# Altium PCB clip_adapter_2.54mm.PcbDoc
Units mm, origin at the board's own origin, x right, y up, seen from the top; angles counter-clockwise.
Board outline 16 x 16 mm, 2 copper layers (Top Layer, Bottom Layer), stack 1.573 mm thick; 2 components, 0 nets, 14 pads, 0 vias.
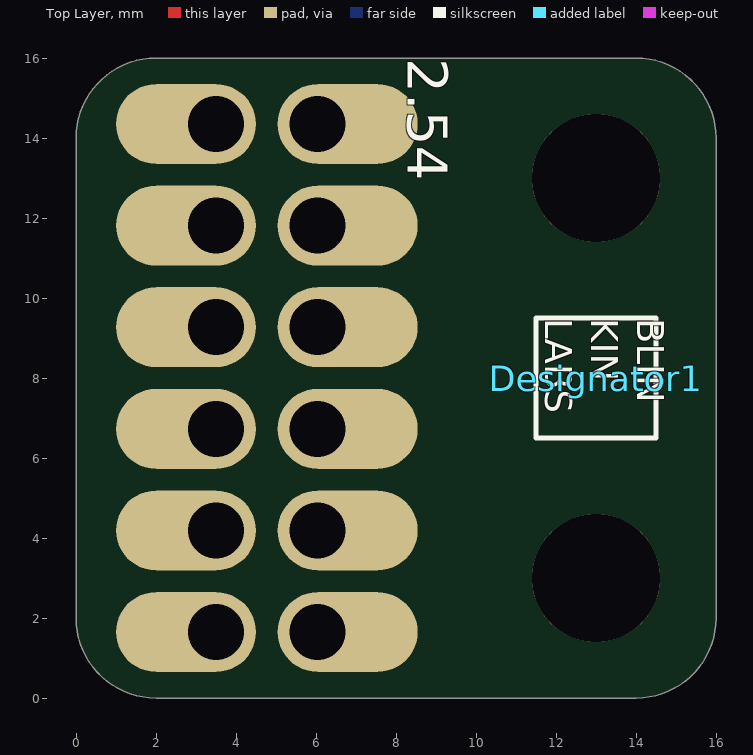
[diagram p0: Top Layer view]
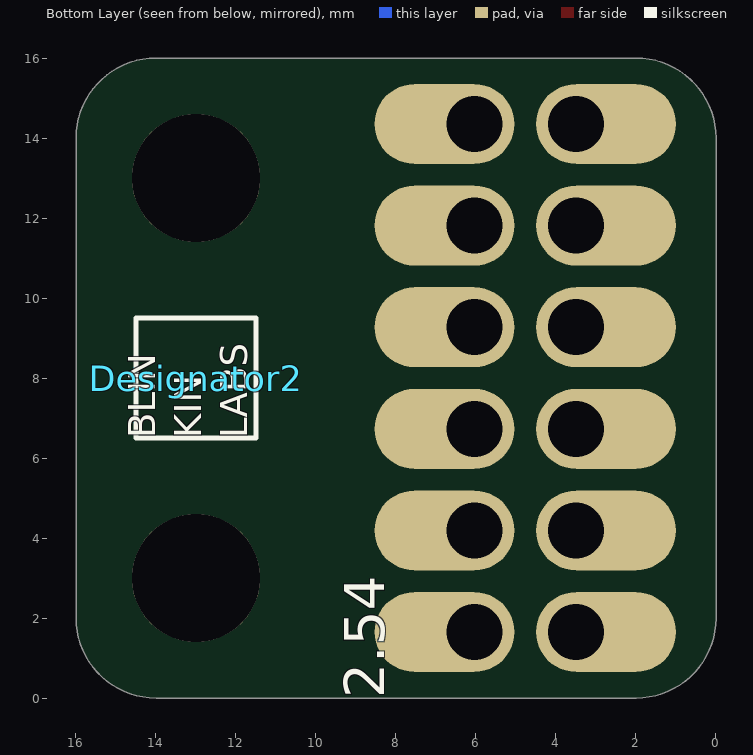
[diagram p1: Bottom Layer view, seen from below]

## Layer stack, top to bottom
Top Solder: solder mask 0.0127, Solder Resist, Dk 3.8
Top Layer: signal copper 0.0356
Dielectric 1: dielectric 1.502, FR-4, Dk 4.8
Bottom Layer: signal copper 0.0356
Bottom Solder: solder mask 0.0127, Solder Resist, Dk 3.8

## Board outline
-0.004,2 -0.004,14 cw(c1.996,14) 1.996,16 13.996,16 cw(c13.996,14) 15.996,14 15.996,2 cw(c13.996,2) 13.996,0 1.996,0 cw(c1.996,2)

## Design rules (kind name [scope] priority, off if disabled: settings)
Clearance [All] p1: gap=0.254 ignorepadtopadclearanceinfootprint=FALSE except(0: Arc-Hole Track-Hole SMDPad-Hole THPad-Hole Via-Hole Fill-Hole Poly-Hole Region-Hole Text-Hole)
PolygonConnect [All] p1: connectstyle=Relief reliefconductorwidth=0.254 reliefentries=4 polygonreliefangle="90 Angle" airgapwidth=0.254
RoutingVias [All] p1: holewidth=0.711 width=1.27 viastyle="Through Hole" minholewidth=0.711 minwidth=1.27 maxholewidth=0.711 maxwidth=1.27
SolderMaskExpansion [All] p1: expansion=0.102 istentingtop=FALSE
Width [All] p1: maxlimit=0.254 minlimit=0.254 preferedwidth=0.254
30 further rules are at their usual default settings.

## Components (designator, comment, footprint, x,y, rotation, side; value= is the part's Value field where it differs from the comment)
Designator1 "Comment" BLINKINLABS_LOGO_SMALL 12.996,8 r270 top
Designator2 "Comment" BLINKINLABS_LOGO_SMALL 12.996,8 r90 bottom

## Footprints (in the part's own frame and the unit in brackets; to place one, negate y for a bottom-side part, rotate by r counter-clockwise, add the part's x,y. Pads: shape width x height; smd on the part's side, far side on the other; paste and mask are expansions set on the pad)
BLINKINLABS_LOGO_SMALL [mm] "Small blinkinlabs logo"
  silkscreen extent -1.5,-1.5 1.5,1.5

## Free pads (board coordinates)
  round 3.2 hole 3.2 unplated: MNT1(12.996,13) MNT2(12.996,3)
  rrect100% 3.5x2 hole 1.4 copper offset -0.75,0 paste+0 mask+0: MNT3(3.496,11.81) MNT5(3.496,9.27) MNT6(3.496,6.73) MNT7(3.496,4.19) MNT8(3.496,1.65) MNT10(3.496,14.35)
  rrect100% 3.5x2 hole 1.4 copper offset 0.75,0 paste+0 mask+0: MNT4(6.036,11.81) MNT11(6.036,14.35) MNT12(6.036,9.27) MNT13(6.036,6.73) MNT14(6.036,4.19) MNT15(6.036,1.65)

## Nets (pads, with @x,y where several pads share a name; then routed paths per layer and width w, separated by ;. In a path a pad name is that pad's centre, name@x,y a point inside that pad or via, vN(x,y) a via of type N, cw(c..) or ccw(c..) an arc to the next point about the centre after c; other vN are vias at no path point)

## Silkscreen, mask and mechanical layers (free items; w line width, h text height)
Top Overlay:
  text "2.54" at 8.29,16 h1 r270
Bottom Overlay:
  text "2.54" at 8.29,0 h1 r270
Mechanical 1:
  circle w0.1: c12.996,13 r1.6
  circle w0.1: c12.996,3 r1.6
  lines w0.1: -0.004,2 ccw(c1.996,2) 1.996,0 13.996,0 ccw(c13.996,2) 15.996,2 15.996,14 ccw(c13.996,14) 13.996,16 1.996,16 ccw(c1.996,14) -0.004,14 -0.004,2

## Text inside footprints (layer, text, board x,y; h text height)
Designator1: Top Overlay "BLIN / KIN / LABS" at 11.496,9.5 h1.15 r270
Designator2: Bottom Overlay "BLIN / KIN / LABS" at 11.496,6.5 h1.15 r270